# Altium PCB 2020-08-19_08-57-09.PcbDoc
Units mil, origin at the board's own origin, x right, y up, seen from the top; angles counter-clockwise.
Board outline 2200 x 1600 mil, 4 copper layers (Top Layer, MidLayer1, MidLayer2, Bottom Layer); 11 components, 6 nets, 21 pads, 22 vias.
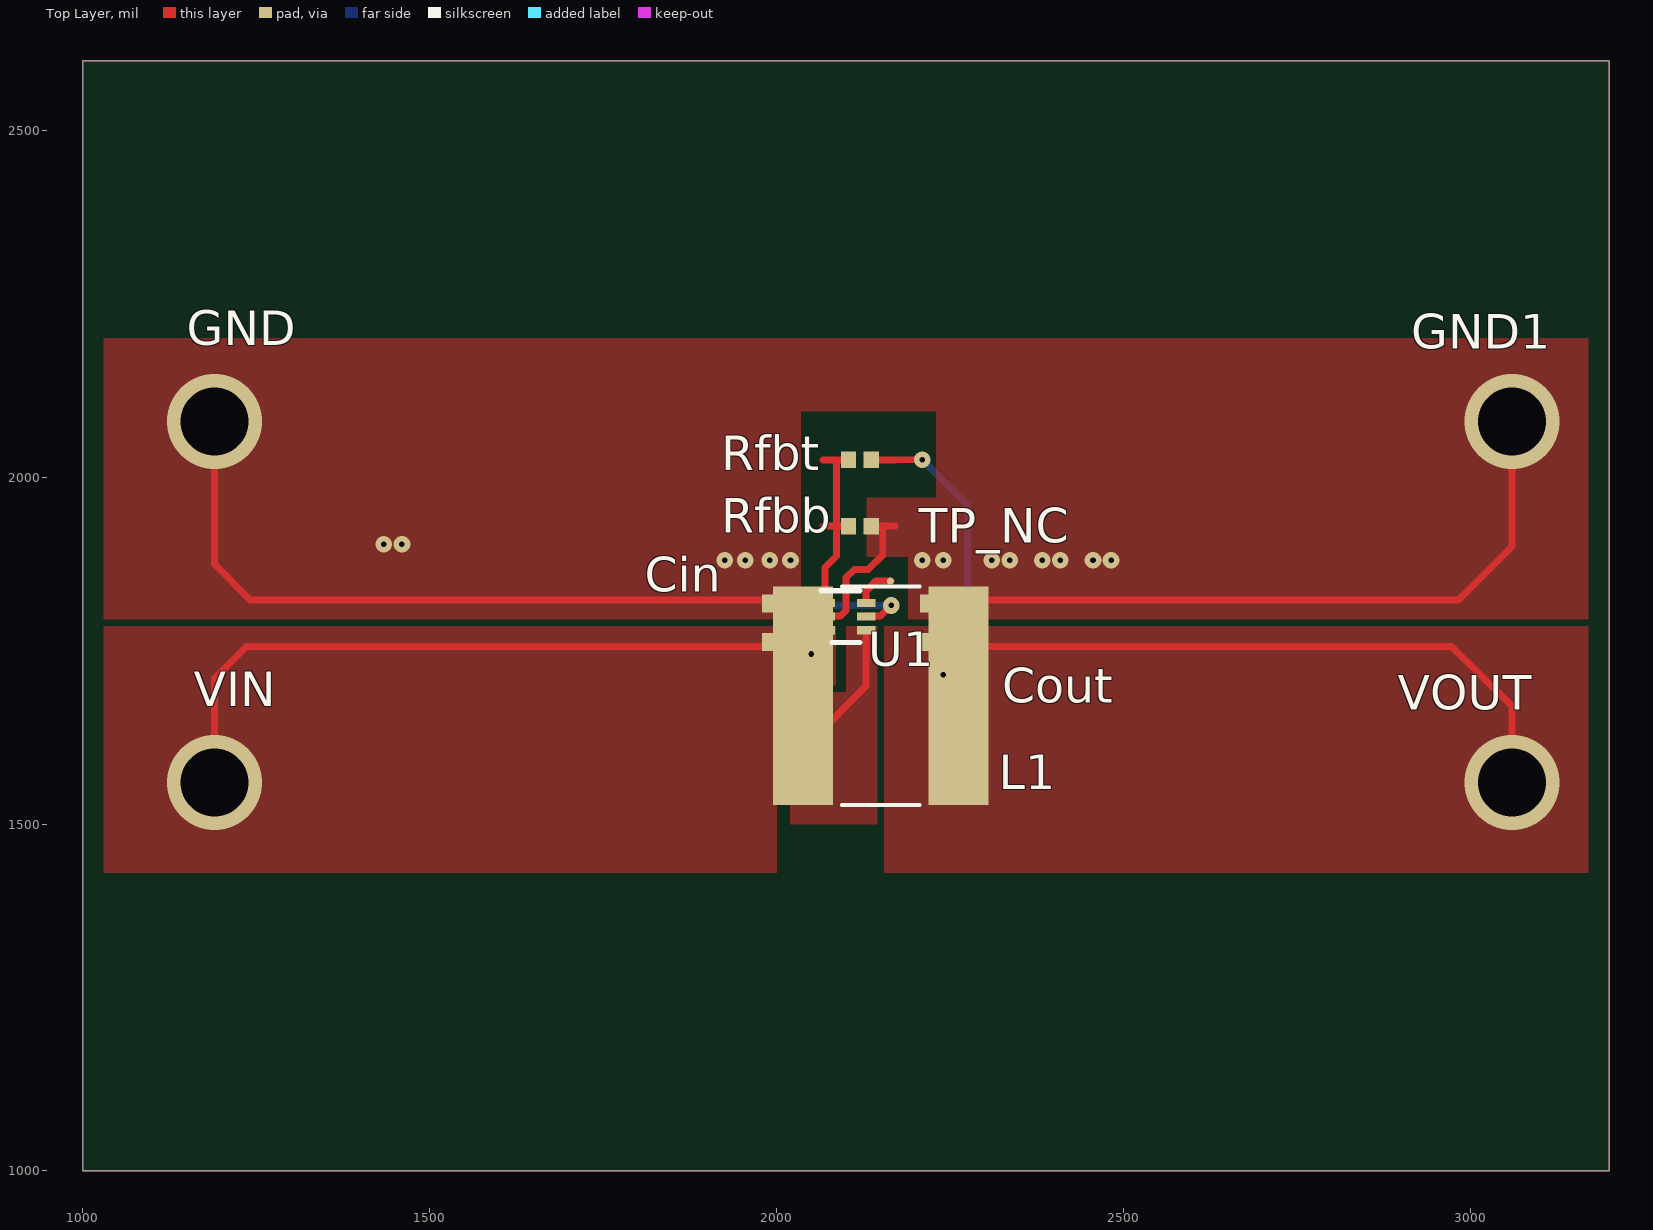
[diagram p0: Top Layer view]
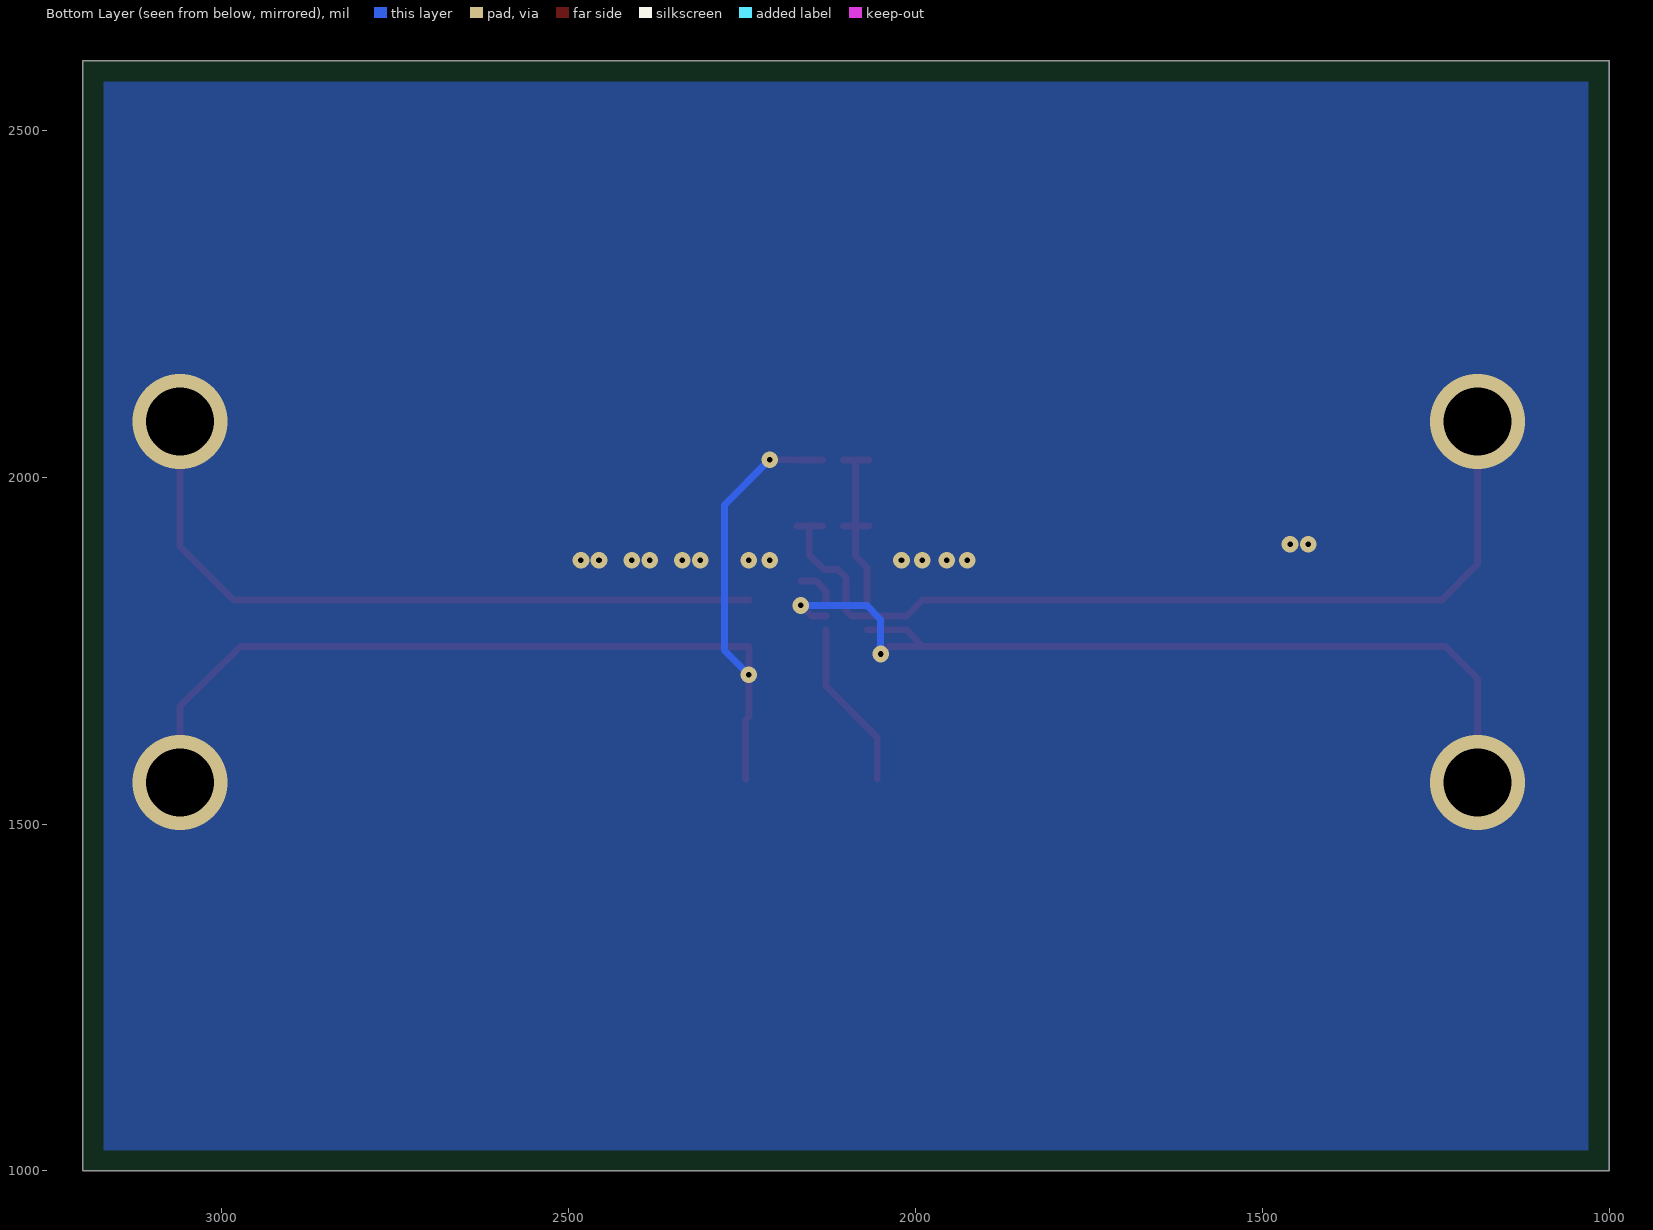
[diagram p1: Bottom Layer view, seen from below]

## Layer stack, top to bottom
Top Solder: solder mask 0.4, Solder Resist, Dk 3.5
Top Layer: signal copper 1.4
Dielectric1: core 12.6, FR-4, Dk 4.8
MidLayer1: signal copper 1.4
Dielectric2: prepreg 12.6, FR-4, Dk 4.8
MidLayer2: signal copper 1.4
Dielectric3: core 12.6, FR-4, Dk 4.8
Bottom Layer: signal copper 1.4
Bottom Solder: solder mask 0.4, Solder Resist, Dk 3.5

## Board outline
1000,1000 3200,1000 3200,2600 1000,2600

## Design rules (kind name [scope] priority, off if disabled: settings)
Clearance [All] p1: gap=10
PlaneConnect [All] p1: planeconnectstyle=Direct reliefexpansion=20 reliefentries=4 reliefconductorwidth=10 reliefairgap=10
PolygonConnect [All] p1: connectstyle=Direct reliefconductorwidth=10 reliefentries=4 polygonreliefangle="90 Angle" airgapwidth=10
RoutingVias [All] p1: holewidth=28 width=50 viastyle="Through Hole" minholewidth=28 minwidth=50 maxholewidth=28 maxwidth=50
SolderMaskExpansion [All] p1: expansion=4
Width [All] p1: maxlimit=10 minlimit=10 preferedwidth=10
29 further rules are at their usual default settings.

## Components (designator, comment, footprint, x,y, rotation, side; value= is the part's Value field where it differs from the comment)
Cin "Comment" 0603 1998,1790 r90 top
Cout "Comment" 0603 2226,1790 r90 top
GND "Comment" TP-1502 1189,2079 r270 top
GND1 "Comment" TP-1502 3059,2079 r270 top
L1 "Comment" SRN8040 2150,1685 r0 top
Rfbb "Comment" 0402 2120,1929 r0 top
Rfbt "Comment" 0402 2120,2025 r180 top
TP_NC "Comment" SMD_PAD1 2164,1850 r90 top
U1 "Comment" DRL0006A 2100,1799 r0 top
VIN "Comment" TP-1502 1189,1559 r270 top
VOUT "Comment" TP-1502 3059,1559 r270 top

## Footprints (in the part's own frame and the unit in brackets; to place one, negate y for a bottom-side part, rotate by r counter-clockwise, add the part's x,y. Pads: shape width x height; smd on the part's side, far side on the other; paste and mask are expansions set on the pad)
0402 [mil]
  rect 22x24 smd: 1(-16.5,0) 2(16.5,0)
0603 [mil]
  rect 26x38 smd: 1(-27.5,0) 2(27.5,0)
DRL0006A [mm]
  rect 0.67x0.3 smd: 1(-0.74,0.5) 2(-0.74,0) 3(-0.74,-0.5) 4(0.74,-0.5) 5(0.74,0) 6(0.74,0.5)
  silkscreen extent -0.9,-0.95 0.5,0.95
SMD_PAD1 [mil]
  round 10 smd: 1(0,0)
SRN8040 [mm]
  rect 2.2x8 smd: 1(-2.85,0) 2(2.85,0)
  silkscreen extent -1.42,-4 1.42,4
TP-1502 [mil]
  round 65 / inner round 0 / far side round 65 hole 32 unplated: 1(0,0)

## Via types
v1: diameter 24/24/24/24 (per signal layer), hole 8, Top Layer to Bottom Layer, 18 vias
v2: diameter 137/137/137/137 (per signal layer), hole 98, Top Layer to Bottom Layer, 4 vias

## Nets (pads, with @x,y where several pads share a name; then routed paths per layer and width w, separated by ;. In a path a pad name is that pad's centre, name@x,y a point inside that pad or via, vN(x,y) a via of type N, cw(c..) or ccw(c..) an arc to the next point about the centre after c; other vN are vias at no path point)
0: Cin.2 Cout.2 L1.1 Rfbb.2 U1.2
1: Rfbb.1 Rfbt.2 U1.1 | length 286.6
  Top Layer w10: 2067,1929.5 Rfbb.1@2104,1929.5 ; 2067,2024.5 Rfbt.2@2104,2024.5 ; U1.1@2070,1819 2070,1870 2086,1886 2086,1930 2086,2025
3: Cout.1 GND1.1 GND.1 L1.2 Rfbt.1 VOUT.1 | length 4036.1
  Top Layer w10: v2(1190,2080) 1190,1875 1241,1823 1990,1823 2013,1800 2070,1800 2092,1800 2100,1808 2100,1855 2112,1867 2132,1867 2153,1888 2153,1930 ; 2013,1780 2070,1780 ; 2134,1929.5 2171,1929.5 ; Rfbt.1@2134,2024.5 2171,2024.5 ; 2153,2025 v1(2210,2025) ; L1.2@2240,1823 2983,1823 3060,1900 v2(3060,2080) ; L1.2@2244,1565 2245,1565 2245,1650 2240,1655 v1(2240,1715) 2240,1756 2973,1756 3060,1670 v2(3060,1560)
  Bottom Layer w10: v1(2210,2025) 2275,1960 2275,1750 v1(2240,1715)
  other v1: 1925,1880 1955,1880 1990,1880 2020,1880 2210,1880 2240,1880 2310,1880 2336,1880 2383,1880 2409,1880 2456,1880 2482,1880 1434,1903 1460,1903
4: TP_NC.1 U1.6 | length 58.5
  Top Layer w10: U1.6@2129,1819 2129,1835 2143,1850 TP_NC.1@2165,1850
5: U1.4 | length 245.7
  Top Layer w10: 2055,1565 2055,1625 2129,1699 U1.4@2129,1780
7: Cin.1 U1.3 U1.5 VIN.1 | length 1282.1
  Top Layer w10: v2(1190,1560) 1190,1710 1236,1756 Cin.1@1990,1756 ; 2013,1780 Cin.1@1990,1756 ; v1(2050,1745) 2038,1756 Cin.1@1990,1756 ; U1.5@2129,1800 2150,1800 v1(2165,1815)
  Bottom Layer w10: v1(2050,1745) 2050,1795 2070,1815 v1(2165,1815)

## Polygon pours and split planes (outlines as drawn)
7 on Top Layer "Top Layer-No Net" (solid, pour order 5): 2000,1430 2000,1700 2085,1700 2085,1785 1030,1785 1030,1430
3 on Top Layer "Top Layer-No Net" (solid, pour order 4): 3170,1785 3170,1430 2155,1430 2155,1785
5 on Top Layer "Top Layer-No Net" (solid, pour order 3): 2145,1785 2145,1500 2020,1500 2020,1690 2100,1690 2100,1785
3 on Top Layer "Top Layer-No Net" (solid, pour order 2): 2130,1970 2230,1970 2230,2095 2035,2095 2035,1795 1030,1795 1030,2200 3170,2200 3170,1795 2190,1795 2190,1885 2130,1885
4 on Top Layer "Top Layer-No Net" (solid, pour order 0): 2170,1850 2169,1850 2169,1851 2169,1852 2168,1853 2167,1854 2166,1854 2165,1854 2165,1855 2164,1854 2163,1854 2162,1854 2161,1853 2160,1852 2160,1851 2160,1850 2160,1849 2160,1848 2160,1847 2161,1846 2162,1845 2163,1845 2164,1845 2165,1845 2166,1845 2167,1845 2168,1846 2169,1847 2169,1848 2169,1849 2170,1850
3 on Bottom Layer "Top Layer-No Net" (solid, pour order 1): 1030,2570 3170,2570 3170,1030 1030,1030

## Other copper
Multi-Layer:
  the board outline again, w1

## Silkscreen, mask and mechanical layers (free items; w line width, h text height)
Top Overlay: